# Altium PCB Board.PcbDoc (part 4 of 4)
Units mm, origin at the board's own origin, x right, y up, seen from the top; angles counter-clockwise.
Board outline 88 x 92.5 mm, 2 copper layers (Top Layer, Bottom Layer); 85 components, 67 nets, 346 pads, 106 vias.
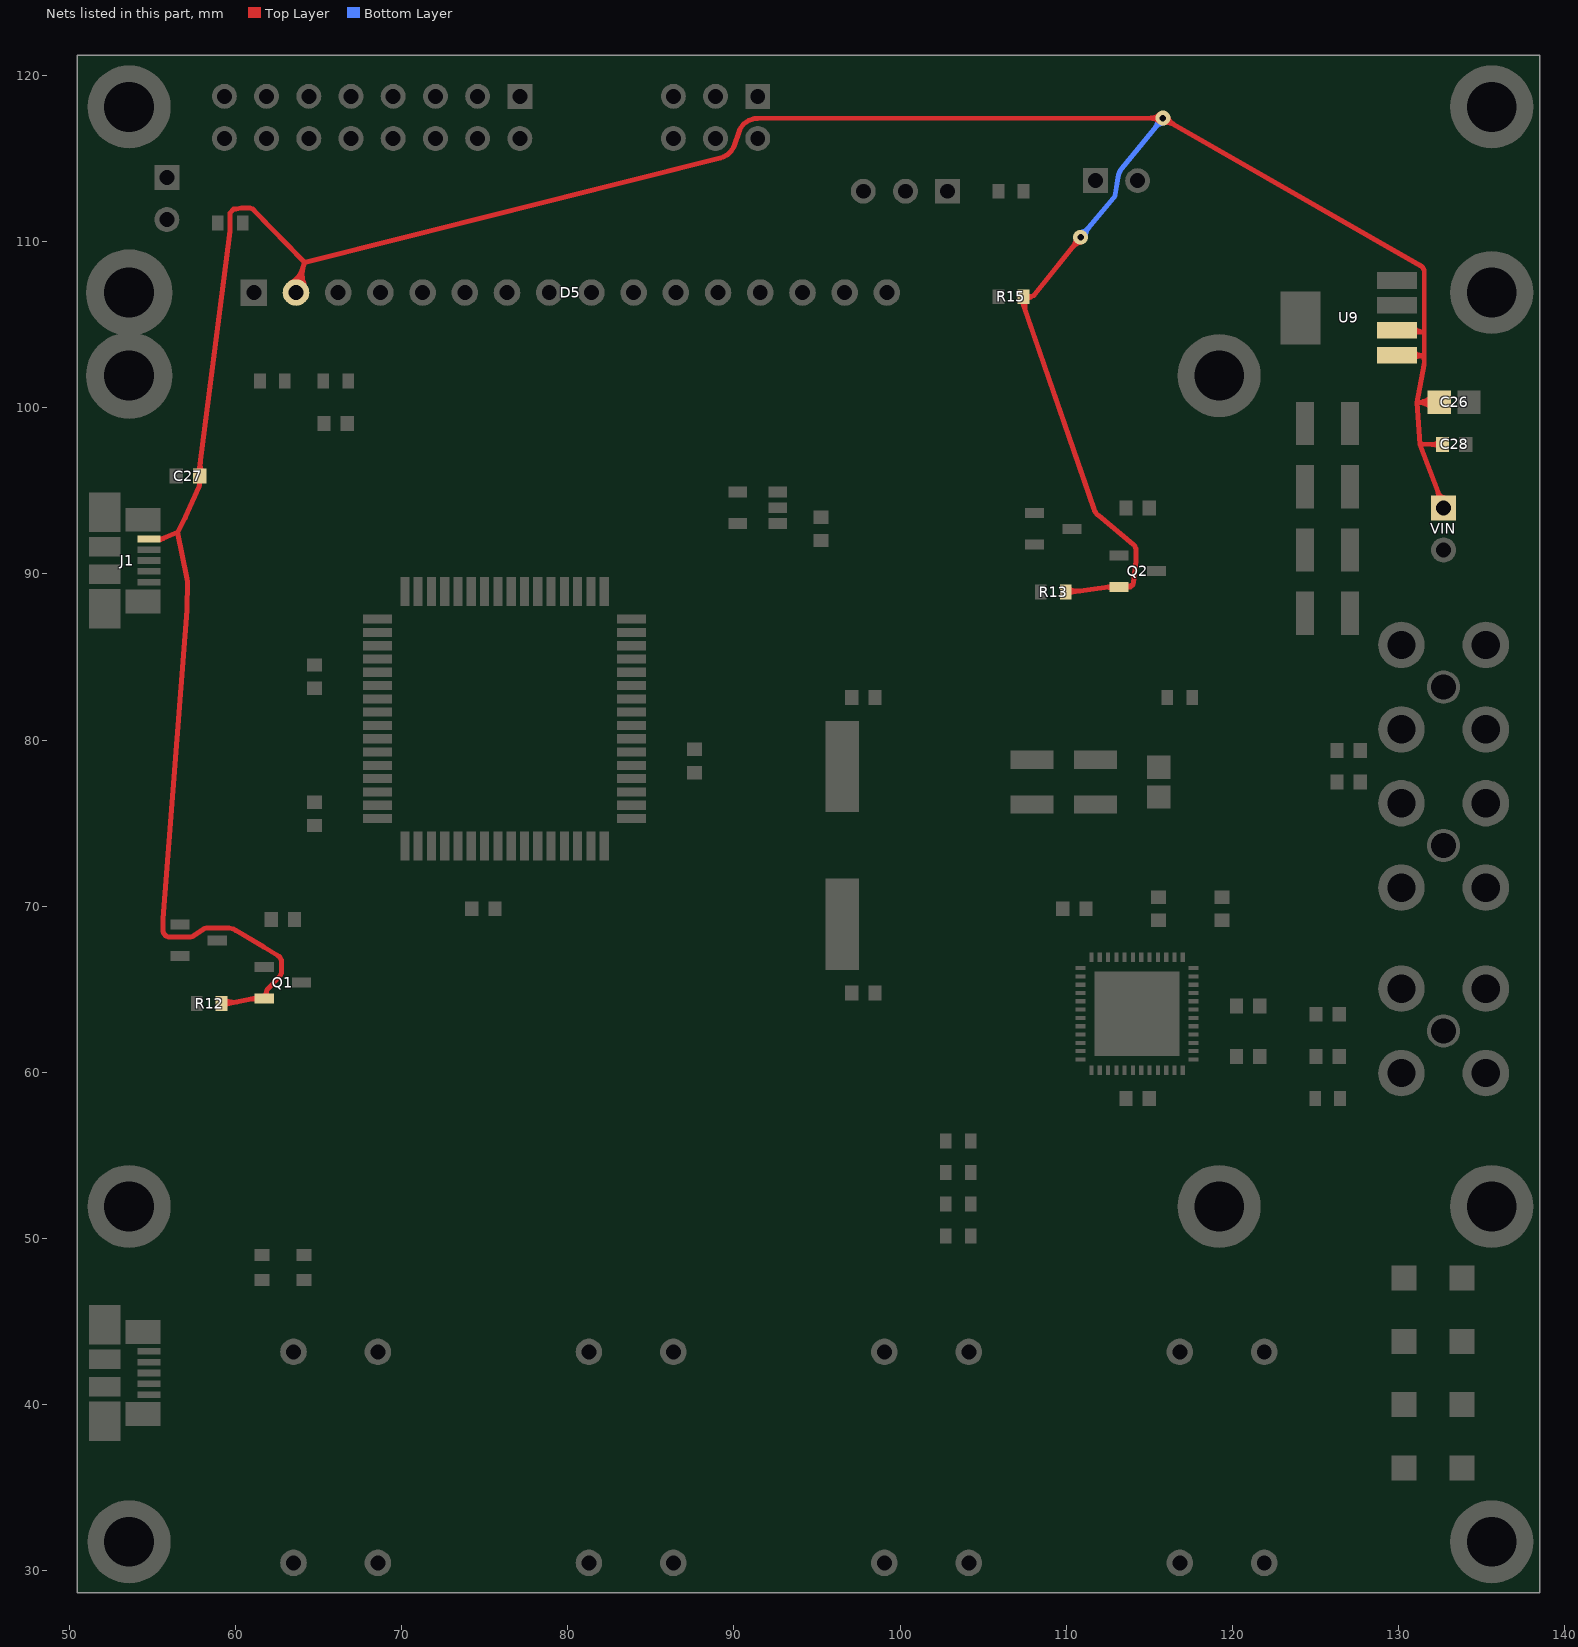
[diagram p4: the nets of this part, all layers, seen from the top]

## Via types
v1: diameter 0.9, hole 0.4, Top Layer to Bottom Layer, tented both sides, 97 vias
v2: diameter 0.8, hole 0.4, Top Layer to Bottom Layer, tented both sides, 9 vias

## Nets (pads, with @x,y where several pads share a name; then routed paths per layer and width w, separated by ;. In a path a pad name is that pad's centre, name@x,y a point inside that pad or via, vN(x,y) a via of type N, cw(c..) or ccw(c..) an arc to the next point about the centre after c; other vN are vias at no path point) (continued)
VIN: C26.2 C27.1 C28.1 D5.2 J1.1 Q1.2 Q2.2 R12.2 R13.2 R15.2 U9.1 U9.2 VIN.1 | length 227.2
  Top Layer w0.3: J1.1@54.81,92.105 55.35,92.105 55.5,92.105 55.544,92.105 55.629,92.123 55.669,92.14 56.52,92.51 ; J1.1@55.331,92.144 ccw(c55.472,92.319) 55.517,92.099 ; J1.1@55.335,92.141 ccw(c55.485,92.295) 55.571,92.098 ; J1.1@55.341,92.134 ccw(c55.469,92.223) 55.531,92.08 ; C27.1@57.697,96.133 ccw(c57.442,96.464) 57.856,96.41 ; C27.1@57.734,96.157 ccw(c57.634,96.348) 57.85,96.348 ; 57.89,96.671 ccw(c58.673,96.57) C27.1@58.048,96.088 ; C27.1@57.966,96.157 cw(c58.066,96.348) 57.85,96.348 ; R12.2@59.17,64.135 59.37,64.135 59.52,64.135 59.543,64.135 ; R12.2@59.28,64.402 ccw(c59.88,65.309) 60.097,64.243 ; R12.2@59.337,64.024 cw(c59.543,63.888) 59.543,64.135 ; R12.2@59.337,64.246 ccw(c59.543,64.382) 59.543,64.135 ; 60.941,64.415 cw(c61.058,63.84) Q1.2@61.382,64.33 ; Q1.2@61.349,64.36 ccw(c61.15,64.199) 61.15,64.455 ; Q1.2@61.349,64.55 cw(c61.15,64.711) 61.15,64.455 ; Q1.2@61.691,64.597 ccw(c61.605,64.842) 61.865,64.842 ; D5.2@63.332,107.501 ccw(c62.563,108.869) 64.074,108.445 ccw(c65.585,108.021) D5.2@64.217,107.252 ; D5.2@63.479,107.239 ccw(c63.065,107.976) 63.878,107.748 ccw(c64.692,107.519) D5.2@63.955,107.105 ; D5.2@63.65,106.934 64.16,108.75 ; R15.2@107.317,106.415 cw(c107.17,106.201) 107.43,106.201 ; R15.2@107.543,106.415 ccw(c107.69,106.201) 107.43,106.201 ; 107.567,105.775 cw(c108.455,106.082) R15.2@107.61,106.493 ; R15.2@107.578,106.545 cw(c107.882,106.269) 107.882,106.68 ; R15.2@107.578,106.815 ccw(c107.882,107.091) 107.882,106.68 ; R15.2@107.592,106.698 ccw(c107.731,106.799) 107.806,106.643 ; R13.2@109.97,88.9 110.17,88.9 110.32,88.9 110.336,88.9 110.368,88.902 110.384,88.905 112.557,89.217 112.568,89.219 112.59,89.22 ; R13.2@110.09,89.16 ccw(c110.693,89.966) 110.836,88.97 ; R13.2@110.138,88.792 cw(c110.336,88.666) 110.336,88.9 cw(c110.336,89.134) R13.2@110.138,89.008 ; v1@110.575,110.229 cw(c109.855,110.151) 110.42,109.697 cw(c110.984,109.244) v1@110.906,109.964 ; v1(110.873,110.262) 108.131,106.848 108.067,106.768 107.882,106.68 ; 112.426,89.198 cw(c112.5,88.685) Q2.2@112.81,89.1 ; Q2.2@112.782,89.127 ccw(c112.59,88.974) 112.59,89.22 ; Q2.2@112.782,89.313 cw(c112.59,89.466) 112.59,89.22 ; Q2.2@113.543,89.337 ccw(c113.769,89.622) 114.011,89.35 ; Q2.2@113.556,89.114 cw(c113.812,88.857) 113.813,89.22 ; Q2.2@113.556,89.326 ccw(c113.812,89.581) 113.812,89.22 ; v1@115.607,117.643 cw(c115.094,118.155) 115.095,117.43 cw(c115.096,116.706) v1@115.607,117.219 ; v1@115.898,117.142 cw(c116.088,116.443) 116.448,117.071 cw(c116.808,117.7) v1@116.109,117.51 ; U9.1@129.9,103.16 130.95,103.12 131.1,103.12 131.547,103.12 ; U9.2@129.9,104.66 130.95,104.61 131.1,104.61 131.122,104.61 ; U9.2@130.832,104.398 cw(c131.284,103.887) 131.416,104.556 ; U9.1@130.847,102.913 cw(c131.349,102.411) 131.349,103.12 ; U9.1@130.847,103.407 ccw(c131.541,104.101) 131.541,103.12 ; U9.2@130.891,104.855 ccw(c131.433,105.219) 131.307,104.578 ; U9.2@130.896,104.474 cw(c131.138,104.321) 131.165,104.606 ; U9.2@130.903,104.484 cw(c131.122,104.357) 131.122,104.61 ; U9.2@130.909,104.496 cw(c131.101,104.394) 131.122,104.61 ; U9.2@130.926,104.787 ccw(c131.193,104.89) 131.165,104.606 ; U9.2@130.935,104.763 ccw(c131.142,104.826) 131.122,104.61 ; U9.2@130.938,104.751 ccw(c131.122,104.8) 131.122,104.61 ; 131.15,100.319 cw(c131.15,99.03) C26.2@132.061,99.941 ; 132.029,97.794 ccw(c132.04,98.421) C28.1@132.476,97.97 ; C26.2@132.056,100.714 cw(c131.118,101.629) 131.118,100.319 ; 132.063,97.793 cw(c132.053,97.214) C28.1@132.47,97.616 ; VIN.1@132.29,94.404 ccw(c131.975,94.718) 132.391,94.875 ccw(c132.826,95.039) VIN.1@132.778,94.577 ; VIN.1@132.291,94.404 ccw(c131.991,94.704) VIN.1@132.415,94.704 ; VIN.1@132.308,94.42 ccw(c132.048,94.701) 132.406,94.837 ccw(c132.78,94.978) VIN.1@132.754,94.579 ; 132.422,94.731 ccw(c133.03,94.842) VIN.1@132.818,94.262 ; C28.1@132.427,97.902 cw(c132.245,97.994) 132.242,97.79 ; C28.1@132.428,97.675 ccw(c132.239,97.578) 132.242,97.79 ; VIN.1@132.431,94.683 ccw(c132.958,94.779) VIN.1@132.802,94.267 ; C26.2@132.45,100.33 131.9,100.319 131.75,100.319 131.118,100.319 ; C28.1@132.65,97.79 132.4,97.79 132.25,97.79 132.242,97.79 ; VIN.1@132.715,93.98 132.415,94.58 132.415,94.73 132.415,94.771 132.4,94.851 132.386,94.889 131.283,97.807 ; 56.52,92.51 56.965,93.348 56.972,93.362 56.987,93.391 56.994,93.407 57.816,95.274 57.833,95.312 57.85,95.393 57.85,95.435 57.85,95.585 C27.1@57.85,95.885 57.85,96.185 57.85,96.335 57.85,96.348 ; 56.52,92.51 57.092,89.721 57.101,89.673 57.111,89.578 57.11,89.529 57.09,87.889 57.087,87.83 55.636,69.23 55.636,69.221 55.635,69.204 55.635,69.195 55.635,68.595 55.635,68.505 55.704,68.34 55.83,68.213 55.996,68.145 56.085,68.145 57.235,68.145 57.301,68.145 57.429,68.183 57.484,68.22 58.086,68.62 58.141,68.657 58.269,68.695 58.335,68.695 59.485,68.695 59.625,68.695 59.897,68.621 60.018,68.55 61.698,67.56 61.713,67.551 62.55,67.039 62.65,66.977 62.765,66.772 62.765,66.655 62.765,66.055 62.765,65.968 62.7,65.807 62.64,65.744 61.99,65.066 61.93,65.003 61.865,64.842 ; 57.85,96.348 57.852,96.374 57.853,96.386 59.687,110.624 59.688,110.636 59.69,110.662 59.69,110.675 59.69,111.575 59.69,111.725 59.886,111.95 60.033,111.971 60.376,112.02 60.391,112.023 60.424,112.025 60.44,112.025 60.79,112.025 60.881,112.025 61.049,111.954 61.113,111.889 64.16,108.75 ; 59.543,64.135 59.587,64.14 59.61,64.144 61.105,64.449 61.12,64.452 61.15,64.455 ; 61.15,64.455 61.165,64.455 61.315,64.455 Q1.2@61.74,64.455 61.865,64.605 61.865,64.755 61.865,64.842 ; 64.16,108.75 89.192,115.041 89.337,115.078 89.601,115.219 89.821,115.421 89.985,115.671 90.034,115.812 90.306,116.598 90.367,116.774 90.591,117.073 90.895,117.29 91.251,117.405 91.439,117.405 v1(115.819,117.431) 131.324,108.55 131.429,108.49 131.55,108.281 131.55,108.16 131.55,104.53 ; 107.43,106.201 107.44,106.143 107.449,106.115 111.68,93.905 111.719,93.79 111.858,93.589 111.953,93.51 114.039,91.765 114.115,91.701 114.2,91.52 114.2,91.42 114.2,90.82 114.2,90.807 114.198,90.781 114.197,90.768 114.048,89.485 114.035,89.372 113.864,89.22 113.75,89.22 113.6,89.22 Q2.2@113.175,89.22 112.75,89.22 112.6,89.22 112.59,89.22 ; 107.43,106.201 107.43,106.23 107.43,106.38 R15.2@107.43,106.68 107.63,106.68 107.78,106.68 107.882,106.68 ; 131.118,100.319 131.283,97.807 ; 131.118,100.319 131.542,102.577 131.546,102.598 131.55,102.641 131.55,102.663 131.547,103.113 131.547,103.116 131.547,103.12 ; 131.122,104.61 131.165,104.606 ; 131.165,104.606 131.187,104.602 131.55,104.53 ; 131.283,97.807 132.242,97.79 ; 131.547,103.12 131.55,103.195 131.55,103.21 131.55,104.53
  Bottom Layer w0.3: v1@110.847,110.561 ccw(c110.783,111.282) 111.338,110.817 ccw(c111.894,110.352) v1@111.172,110.288 ; v1(110.873,110.262) 112.855,112.626 112.894,112.673 112.945,112.784 112.954,112.844 113.115,113.854 113.14,114.01 113.27,114.3 113.369,114.423 v1(115.819,117.431) ; v1@115.521,117.401 cw(c114.8,117.327) 115.362,116.87 cw(c115.924,116.412) v1@115.85,117.133
pads on no net: CLOCKTAMER.3 CLOCKTAMER.5 J1.2 J1.3 J1.4 U1.2 U1.7 U1.9 U1.10 U1.12 U1.17 U1.18 U1.20 U1.21 U1.23 U1.24 U1.32 U1.38 U1.39 U1.41 U1.42 U1.44 U1.45 U1.47 U1.48 U3.1 U3.3 U3.29 U3.30 U3.32 U3.35 U3.36 U3.37 U3.38 U3.54 U3.55 U3.56 U3.57 U9.4

## Polygon pours and split planes (outlines as drawn)
VCCLMK on Top Layer "Bottom Layer-No Net" (solid, remove dead copper, pour order 5): 101.713,81.28 124.46,81.28 124.46,57.15 123.19,55.88 105.41,55.88 105.41,57.15 101.6,60.96
GND on Bottom Layer "Bottom Layer-No Net" (solid, remove dead copper, pour order 4): 50.5,121.2 50.5,28.7 138.5,28.7 138.5,121.2

## Keep-outs
Keep-Out Layer:
  the board outline again, w0.254

## Other copper
Top Layer:
  pour cut-out: 110.42,67.38 118.12,67.38 118.12,59.68 110.42,59.68
  text "CLOCKTAMER" at 71.755,51.435 h2 r31.3
  text "TESTER 1.0" at 73.66,48.26 h2 r31.3
Multi-Layer:
  lines w0: 0.794,0 0,0 ; 0.795,0 0,0 ; 0.806,0 0,0 ; 1.169,0 0,0 ; 1.182,0 0,0 ; 1.355,0 0,0 ; 1.401,0 0,0 ; 1.419,0 0,0 ; 1.548,0 0,0 ; 1.618,0 0,0 ; 1.62,0 0,0 ; 1.645,0 0,0 ; 1.67,0 0,0 ; 1.766,0 0,0 ; 1.808,0 0,0 ; 1.833,0 0,0 ; 1.892,0 0,0 ; 1.908,0 0,0 ; 1.909,0 0,0 ; 1.91,0 0,0 ; 1.913,0 0,0 ; 1.929,0 0,0 ; 1.93,0 0,0 ; 1.945,0 0,0 ; 1.954,0 0,0 ; 2,0 0,0 ; 2.012,0 0,0 ; 2.037,0 0,0 ; 2.097,0 0,0 ; 2.105,0 0,0 ; 2.121,0 0,0 ; 2.122,0 0,0 ; 2.138,0 0,0 ; 2.144,0 0,0 ; 2.152,0 0,0 ; 2.155,0 0,0 ; 2.194,0 0,0 ; 2.209,0 0,0 ; 2.211,0 0,0 ; 2.213,0 0,0 ; 2.215,0 0,0 ; 2.251,0 0,0 ; 2.286,0 0,0 ; 2.288,0 0,0 ; 2.293,0 0,0 ; 2.322,0 0,0 ; 2.323,0 0,0 ; 2.344,0 0,0 ; 2.345,0 0,0 ; 2.35,0 0,0 ; 2.393,0 0,0 ; 2.421,0 0,0 ; 2.428,0 0,0 ; 2.452,0 0,0 ; 2.464,0 0,0 ; 2.469,0 0,0 ; 2.471,0 0,0 ; 2.498,0 0,0 ; 2.53,0 0,0 ; 2.561,0 0,0 ; 2.583,0 0,0 ; 2.589,0 0,0 ; 2.593,0 0,0 ; 2.625,0 0,0 ; 2.629,0 0,0 ; 2.637,0 0,0 ; 2.657,0 0,0 ; 2.688,0 0,0 ; 2.725,0 0,0 ; 2.726,0 0,0 ; 2.754,0 0,0 ; 2.787,0 0,0 ; 2.798,0 0,0 ; 2.826,0 0,0 ; 2.877,0 0,0 ; 2.902,0 0,0 ; 2.936,0 0,0 ; 2.937,0 0,0 ; 2.948,0 0,0 ; 3,0 0,0 ; 3.001,0 0,0 ; 3.016,0 0,0 ; 0,0 2.08,0 0,0 ; 0,0 1.871,0 ; 0,0 1.871,0 ; 0,0 1.935,0 ; 0,0 1.935,0 ; 0,0 2.357,0 ; 0,0 2.357,0 ; 0,0 2.357,0 ; 0,0 2.357,0 ; 0,0 2.161,0 ; 0,0 2.161,0 ; 0,0 2.357,0 ; 0,0 2.161,0 ; 0,0 1.484,0 0,0 ; 0,0 1.097,0 ; 0,0 0.774,0 ; 0,0 0.774,0 ; 0,0 0.774,0 ; 0,0 2.716,0 ; 0,0 2.716,0 ; 0,0 2.716,0 ; 0,0 2.716,0 ; 0,0 1.657,0 0,0 ; 0,0 1.097,0 ; 0,0 1.097,0 ; 0,0 1.097,0 ; 0,0 2.716,0 ; 0,0 2.716,0 ; 0,0 2.716,0 ; 0,0 1.935,0 ; 0,0 2.065,0 0,0 ; 0,0 2.258,0 ; 0,0 2.387,0 0,0 ; 0,0 2.258,0 ; 0,0 2.5,0 0,0 ; 0,0 2.952,0 ; 0,0 2.952,0 ; 0,0 2.952,0 ; 0,0 2.952,0 ; 0,0 2.952,0 ; 0,0 2.952,0 ; 0,0 2.952,0 ; 0,0 2.806,0 ; 0,0 1.319,0 0,0 ; 0,0 2.716,0 ; 0,0 1.097,0 ; 0,0 2.71,0 0,0 ; 0,0 2.952,0 ; 0,0 2.952,0 ; 0,0 2.47,0 ; 0,0 2.357,0 ; 0,0 1.769,0 ; 0,0 1.769,0 ; 0,0 1.769,0 ; 0,0 1.769,0 ; 0,0 1.769,0 ; 0,0 1.769,0 ; 0,0 1.769,0 ; 0,0 1.769,0 ; 0,0 1.769,0 ; 0,0 1.769,0 ; 0,0 1.769,0 ; 0,0 1.769,0 ; 0,0 1.769,0 ; 0,0 1.769,0 ; 0,0 1.769,0 ; 0,0 1.769,0 ; 0,0 1.769,0 ; 0,0 1.769,0 ; 0,0 1.769,0 ; 0,0 1.769,0 ; 0,0 1.769,0 ; 0,0 1.769,0 ; 0,0 1.769,0 ; 0,0 1.769,0 ; 0,0 2.158,0 ; 0,0 2.158,0 ; 0,0 2.158,0 ; 0,0 2.158,0 ; 0,0 2.158,0 ; 0,0 2.158,0 ; 0,0 2.158,0 ; 0,0 2.158,0 ; 0,0 2.726,0 ; 0,0 2.726,0 ; 0,0 2.725,0 ; 0,0 2.725,0 ; 0,0 2.47,0 ; 0,0 2.47,0 ; 0,0 2.47,0 ; 0,0 2.47,0 ; 0,0 2.47,0 ; 0,0 2.471,0 ; 0,0 2.471,0 ; 0,0 1.81,0 0,0 ; 0,0 2.806,0 ; 0,0 2.806,0 ; 0,0 2.806,0 ; 0,0 1.922,0 0,0 ; 0,0 1.549,0 0,0 ; 0,0 1.832,0 0,0 ; 0,0 1.871,0 ; 0,0 2.903,0 ; 0,0 1.774,0 0,0 ; 0,0 2.716,0 ; 0,0 1.465,0 0,0 ; 0,0 2.935,0 ; 0,0 2.935,0 ; 0,0 2.903,0 ; 0,0 2.903,0 ; 0,0 2.952,0 ; 0,0 2.806,0 ; 0,0 2.806,0 ; 0,0 2.935,0 ; 0,0 2.935,0 ; 0,0 2.903,0 ; 0,0 2.851,0 0,0 ; 0,0 2.935,0 ; 0,0 2.935,0 ; 0,0 2.942,0 0,0 ; 0,0 2.258,0 ; 0,0 2.452,0 0,0

## Silkscreen, mask and mechanical layers (free items; w line width, h text height)
Top Overlay:
  text "LVDS_N" at 128.27,87.63 h1.52
  text "Power only" at 53.34,71.12 h1.52 r90
  text "LVDS_P" at 128.27,67.31 h1.52
  text "CMOS" at 128.27,55.88 h1.52
  text "FLASH & TEST" at 91.44,46.99 h1.52
  text "DOWN" at 80.01,45.72 h1.52
  text "CANCEL/BACK" at 111.76,45.72 h1.52
  text "UP" at 64.77,44.45 h1.52
  text "OK" at 100.33,44.45 h1.52
  text "USB OTG" at 58.42,33.02 h1.52 r90

## Text inside footprints (layer, text, board x,y; h text height)
CLOCKTAMER: Top Overlay "2" at 79.66,116.713 h1.27 r180; Top Overlay "1" at 79.66,119.253 h1.27 r180
ISP: Top Overlay "6" at 84.836,116.713 h1.27 r180; Top Overlay "5" at 84.836,119.253 h1.27 r180; Top Overlay "2" at 93.98,116.713 h1.27 r180; Top Overlay "1" at 93.472,119.253 h1.27 r180